# Altium PCB FCB_REV3.PcbDoc (part 2 of 2)
Units mil, origin at the board's own origin, x right, y up, seen from the top; angles counter-clockwise.
Board outline 3750 x 3250 mil, 4 copper layers (Top Layer, Layer 1, Layer 2, Bottom Layer), stack 23.756 mil thick; 113 components, 86 nets, 742 pads, 129 vias.
Unrouted connection lines stored in the file: 77.
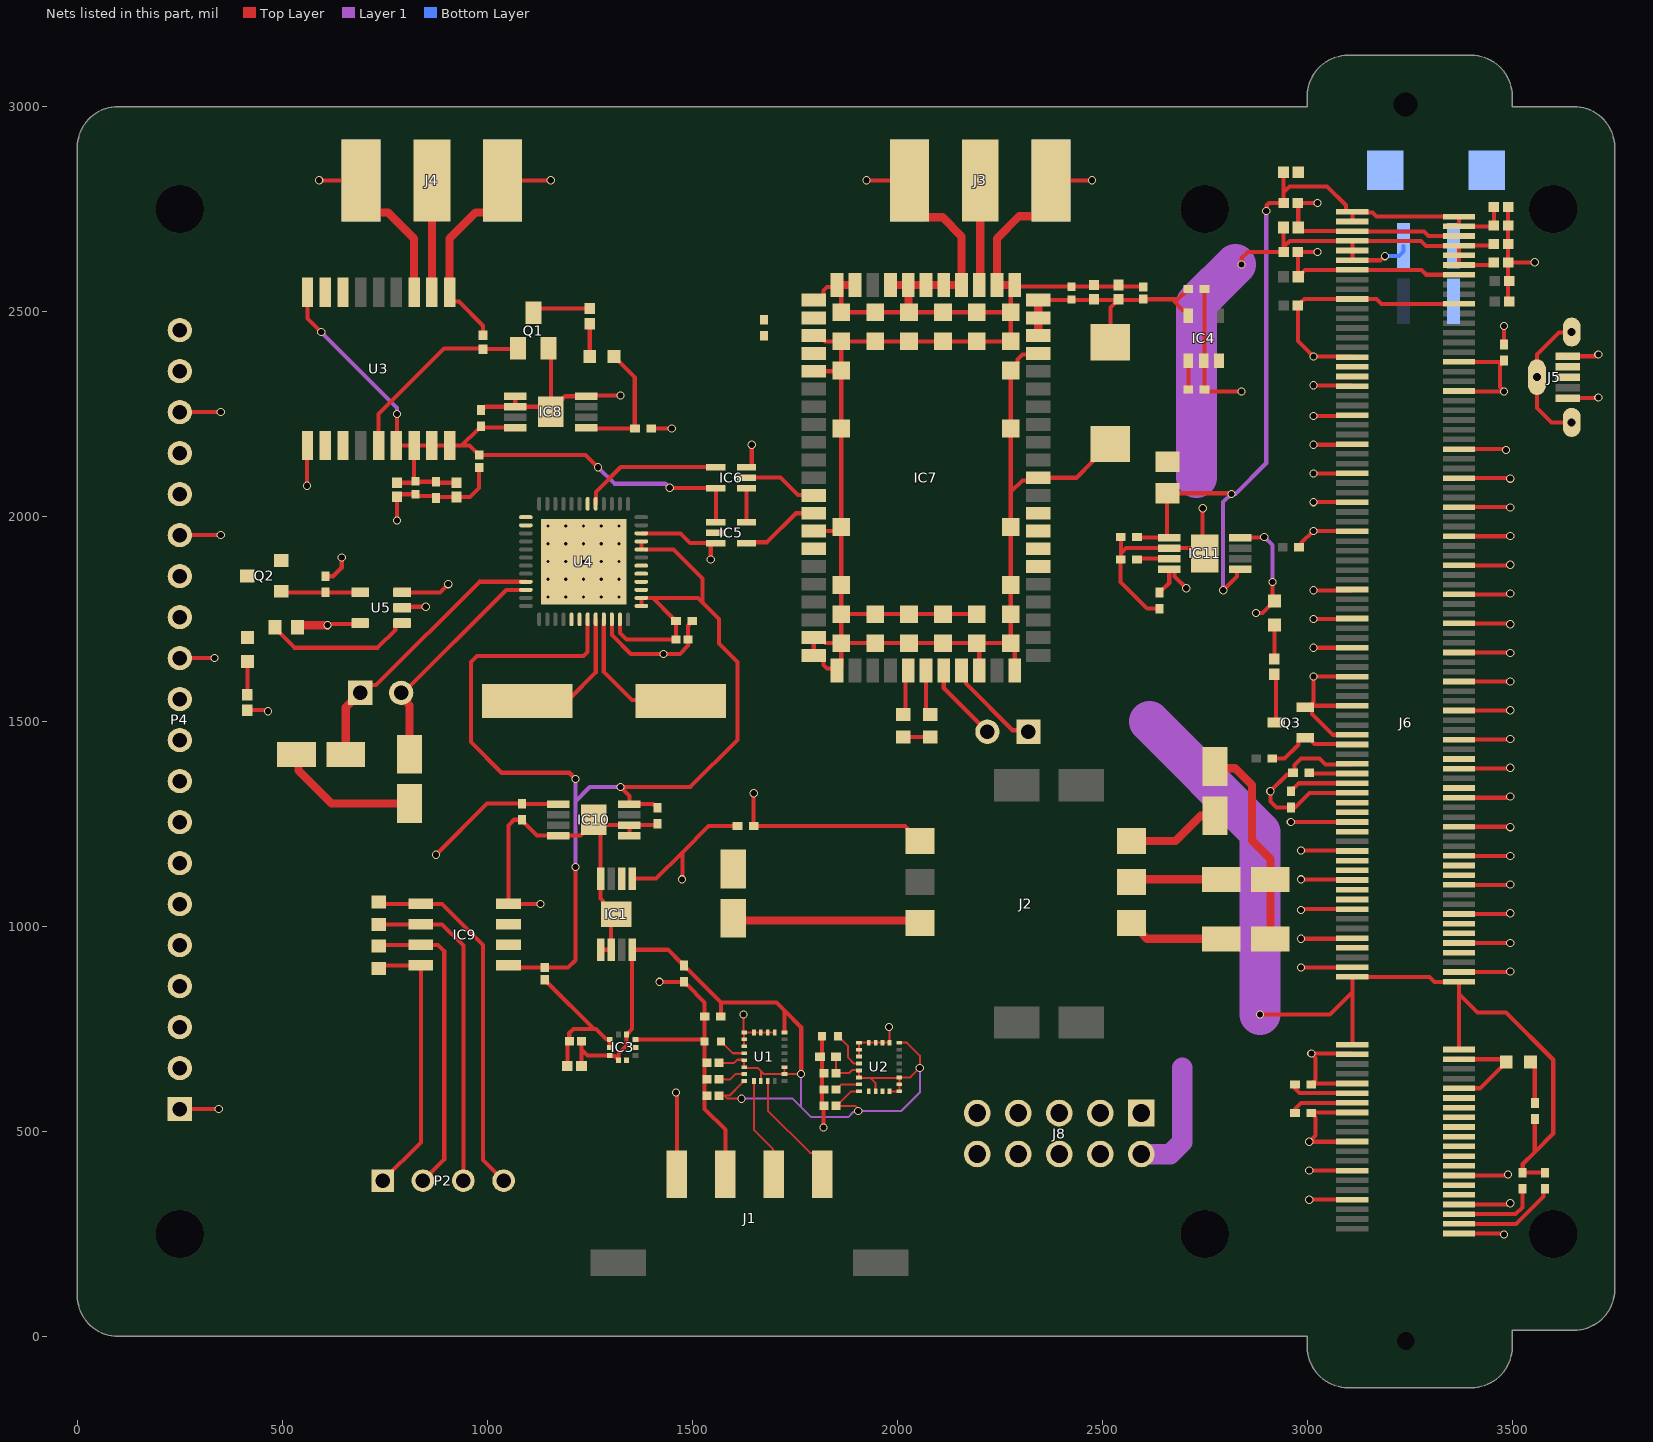
[diagram p4: the nets of this part, all layers, seen from the top]

## Via types
v1: diameter 20, hole 15, Top Layer to Bottom Layer, 104 vias
v2: diameter 19.68, hole 7.87, Top Layer to Bottom Layer, 25 vias

## Nets (pads, with @x,y where several pads share a name; then routed paths per layer and width w, separated by ;. In a path a pad name is that pad's centre, name@x,y a point inside that pad or via, vN(x,y) a via of type N, cw(c..) or ccw(c..) an arc to the next point about the centre after c; other vN are vias at no path point) (continued)
3.3V: C41.2 C50.2 C51.1 C52.1 C53.1 C54.1 DS3.1 IC11.4 IC11.8 J6.39 J6.40 J6.41 J6.42 J6.189 J6.190 J6.191 J6.192 J6.193 J6.194 R25.1 R26.1 R30.1 U5.3 | length 4570.4
  Top Layer w10: U5.3@792.36,1815 885,1815 v1(905,1835) ; C41.2@2640,1814.69 2640,1816.65 2644.84,1821.5 2646.81,1821.5 2663.39,1838.07 IC11.4@2663.39,1871.61 2672.53,1871.61 2676.39,1867.76 2676.39,1853.61 v1(2705,1825) ; IC11.8@2836.61,1948.39 2893.39,1948.39 v1(2895,1950) ; v1(2840,2615) 2840.18,2615.18 2840.18,2630.18 2855,2645 C51.1@2942.68,2645 ; v1(2875,1765) 2890.94,1765 DS3.1@2920,1794.06 2915,1799.06 v1(2915,1840) ; v1(2885,785) 3055,785 3110.08,840.08 ; C50.2@2941.89,2705 2941.89,2650.43 2945,2647.32 2945,2660 2957.32,2672.32 J6.193@3110.08,2672.32 ; J6.40@3110.08,711.69 3110.08,840.08 ; v1(3190,2635) 3189.06,2635 3179.14,2625.08 J6.189@3110.08,2625.08 J6.191@3110.08,2648.7 J6.193@3110.08,2672.32 ; J6.39@3369.92,699.88 3369.92,835 ; C53.1@3455.35,2620 3448.62,2613.27 J6.190@3369.92,2613.27 J6.192@3369.92,2636.89 J6.194@3369.92,2660.51 ; C52.1@3455.35,2665 3450.87,2660.51 J6.194@3369.92,2660.51 ; R30.1@3555,530.32 3555,450 ; R25.1@3580,399.68 R26.1@3525,399.68 3525.64,400.32 3525.64,420.64 3555,450 ; 3110.08,840.08 J6.42@3110.08,877.05 3297.95,877.05 3310,865 3369.69,865 3369.92,864.76 3369.92,835 ; J6.193@3110.08,2672.32 3277.68,2672.32 3290,2660 3369.41,2660 J6.194@3369.92,2660.51 ; 3369.92,835 3414.92,790 3485,790 3600,675 3600,495 3555,450
  Layer 1 w10: v1(2895,1950) 2915,1930 v1(2915,1840)
  Layer 1 w40: 2825,2615 v1(2840,2615)
  Layer 1 w100: 2615,1500 2885,1230 v1(2885,785) ; 2730,2095.57 2730,2520 2735,2525 2825,2615
  Bottom Layer w10: v1(3190,2635) 3223.86,2635 3235,2646.14 C54.1@3235,2660
3.8_SARA_EN: IC4.3 J6.48
5V: C9.2 C11.2 C14.2 C22.2 DS1.1 F1.2 IC1.1 IC4.1 IC8.1 IC10.1 J1.4 J8.2 L3.1 U5.5 | length 1766.7
  Top Layer w10: F1.2@537.56,1730 F1.2@542.56,1735 ; v1(610,1735) 612.6,1737.6 687.4,1737.6 U5.5@690,1740.2 ; v1(875,1175) 999.68,1299.68 C11.2@1085,1299.68 1086.3,1298.39 IC10.1@1173.39,1298.39 ; IC8.1@1241.61,2216.61 1243.23,2215 C22.2@1359.84,2215 ; DS1.1@1309.06,2390 1359.84,2339.21 C22.2@1359.84,2215 ; IC1.1@1353.39,1116.61 1411.61,1116.61 1475.81,1180.81 ; C22.2@1360.31,2215 C22.2@1359.84,2215 ; v1(1460,595) 1460,592.29 1462.56,589.73 J1.4@1462.56,395.75 ; v1(1475,1115) 1475.81,1115.81 1475.81,1180.81 ; C9.2@1608.35,1245 1540,1245 1475.81,1180.81 ; C14.2@2705.16,2305.16 C14.2@2710,2310 IC4.1@2710,2379.76
  Top Layer w20: F1.2@542.56,1735 v1(610,1735)
  Layer 1 w50: J8.2@2595,445 2665.71,445 2695,474.29 2695,655
5V_COMPUTE: C42.2 C45.1 C46.2 C47.1 C48.1 C49.1 IC11.1 IC11.5 J6.197 J6.198 J6.199 J6.200 L3.2 | length 2195.3
  Top Layer w10: C42.2@2584.69,1950 2586.3,1948.39 IC11.1@2663.39,1948.39 ; L3.2@2636.06,2066.37 L3.2@2652.43,2050 ; IC11.1@2657.53,1948.39 2657.53,2041.67 L3.2@2665.85,2050 ; L3.2@2659.14,2056.71 2813.29,2056.71 v1(2815,2055) ; v1(2795,1820) 2828.61,1853.61 2828.61,1867.76 2832.47,1871.61 IC11.5@2836.61,1871.61 ; v1(2900,2745) 2901.21,2746.21 2901.21,2759.14 2907.07,2765 C49.1@2942.68,2765 2941.89,2765.79 2941.89,2790 ; C46.2@2941.89,2840 2941.89,2790 ; J6.197@3110.08,2719.57 J6.199@3110.08,2743.19 ; C47.1@3455.35,2755 C48.1@3455.35,2710 3453.11,2707.76 J6.198@3369.92,2707.76 J6.200@3369.92,2731.38 3168.62,2731.38 3158.7,2741.3 3111.97,2741.3 J6.199@3110.08,2743.19 ; 2941.89,2790 2956.89,2805 3048.27,2805 3094.05,2759.22 3094.05,2745.08 3095.94,2743.19 J6.199@3110.08,2743.19
  Layer 1 w10: v1(2795,1820) 2795,2035 v1(2815,2055) 2825,2055 2900,2130 v1(2900,2745)
5V_PDB: DS2.1 F1.1 P4.13 P4.14 Q2.3 U5.1 | length 363.2
  Top Layer w10: Q2.3@415,1854.58 Q2.3@415,1855 ; F1.1@482.44,1730 493.19,1719.25 493.19,1716.81 530,1680 732.17,1680 775.71,1723.54 775.71,1733.39 782.52,1740.2 U5.1@792.36,1740.2
+1.8_SARA_OUT: IC5.5 IC6.1 IC7.4 R4.2 R5.2 | length 148.8
  Top Layer w10: IC5.5@1632.4,1985.59 IC6.1@1632.4,2069.41 ; R5.2@2015,1462.44 R4.2@2080,1462.44
+3.3_ADC_BARO_ACC: C1.2 C2.2 C5.2 C6.2 C10.2 C12.2 C13.2 C31.2 C33.2 IC1.8 IC3.1 IC3.6 IC3.10 U1.1 U1.3 U1.7 U1.8 U1.13 U1.22 U1.23 U2.1 U2.3 U2.5 U2.6 U2.7 U2.8 U2.13 U2.22 U2.23 | length 2733.6
  Top Layer w5: C2.2@1565.71,667.32 1602.32,667.32 1610,675 1625.43,675 U1.22@1626.57,673.86 U1.23@1626.57,656.93 1628.48,655.03 1634.2,655.03 ; v1(1620,580) 1585.61,580 1578.29,587.32 1590.83,587.32 1622.18,618.68 1622.18,621.04 1624.21,623.07 U1.1@1626.57,623.07 ; 1634.22,655 1660,655 1667.32,647.68 ; U1.3@1667.32,623.07 1667.32,647.68 ; U1.8@1725,656.93 U1.7@1725,640 ; v1(1765,640) U1.7@1725,640 ; C33.2@1850.79,562.32 1897.68,562.32 1905,555 v1(1905,550) ; C5.2@1850.83,682.32 C6.2@1850.83,642.32 1882.32,642.32 1890,650 1905.43,650 U2.22@1906.57,648.86 U2.23@1906.57,631.93 1908.5,630 1935,630 ; C33.2@1851.56,561.56 1851.56,562.3 1859.31,570.06 1860.06,570.06 1888.07,598.07 U2.1@1906.57,598.07 ; U2.3@1947.32,598.07 1947.32,617.68 1935,630 ; U2.5@1981.18,598.07 U2.6@2005,598.07 U2.7@2005,615 U2.8@2005,631.93 ; U2.13@2005,716.57 2023.43,716.57 2055,685 v1(2055,655) 2031.93,631.93 U2.8@2005,631.93 ; 1667.32,647.68 1675,640 U1.7@1725,640 ; 1935,630 2003.07,630 U2.8@2005,631.93
  Top Layer w10: C13.2@1229.96,720 C13.2@1229.96,720 1230,700 ; C12.2@1230,660 1230,700 ; IC3.1@1320,674.65 1320,690 1339.84,709.84 IC3.6@1339.84,736.5 1339.84,737.48 1340.75,738.39 1341.73,738.39 1353.39,750.04 IC1.8@1353.39,943.39 1441.3,943.39 1473.19,911.5 1475.16,911.5 1480,906.65 C10.2@1480,904.69 1480,902.72 1484.84,897.87 1486.81,897.87 1569.69,815 ; IC3.1@1320.16,673.5 1320.16,674.49 1319.25,675.39 1310.24,684.41 1299.41,684.41 IC3.10@1298.5,685.32 1244.68,685.32 1230,700 ; C1.2@1569.69,780 1569.69,815 ; U1.13@1725,741.57 1725,795 ; v1(1765,640) 1765.86,640.86 1765.86,754.14 1725,795 ; 1569.69,815 1705,815 1725,795
  Layer 1 w5: v1(1620,580) 1745,580 1765,560 ; v1(1765,640) 1765,560 ; v1(2055,655) 2055,595 2010,550 v1(1905,550) 1902.63,547.63 1892.63,547.63 1880,535 1790,535 1765,560
+3.3_GPS: C21.2 C23.1 C24.1 C25.2 C26.2 C27.2 IC5.1 IC6.5 IC8.8 U3.6 U3.7 U3.8 U3.9 U3.18 | length 1761.1
  Top Layer w10: U3.18@561.77,2547.01 561.77,2483.23 v1(595,2450) ; C23.1@780,2082.32 821.57,2082.32 C24.1@825,2085.75 ; v1(780,2250) 780,2174.68 U3.6@778.31,2172.99 U3.7@821.61,2172.99 ; C26.2@925,2082.32 877.36,2082.32 C25.2@875,2084.69 826.06,2084.69 C24.1@825,2085.75 ; IC8.8@1068.39,2216.61 988.7,2216.61 C21.2@985,2220.31 985,2218.35 980.16,2213.5 978.19,2213.5 937.68,2172.99 ; v1(1270,2120) 1240,2150 C27.2@980,2149.96 C27.2@980,2149.96 980,2150.75 974.76,2155.98 973.98,2155.98 956.97,2172.99 937.68,2172.99 ; v1(1445,2070) 1445.59,2069.41 IC6.5@1557.6,2069.41 IC5.1@1557.6,1985.59 ; U3.7@821.61,2172.99 U3.8@864.92,2172.99 U3.9@908.23,2172.99 937.68,2172.99 ; U3.7@821.61,2172.99 821.61,2089.13 C24.1@825,2085.75
  Layer 1 w10: v1(595,2450) 779.82,2265.18 779.82,2250.18 v1(780,2250) ; v1(1270,2120) 1310,2080 1434.14,2080 1444.14,2070 v1(1445,2070)
+3.3_MAX3488_MAX14830: C28.2 C29.2 C30.2 C32.2 IC9.1 IC10.8 U4.1 U4.2 U4.8 U4.9 U4.43 U4.47 | length 3148.5
  Top Layer w10: IC9.1@1051.77,905 1056.77,900 C28.2@1140,900 1197.29,900 1215,917.71 v1(1215,1145) ; v1(1215,1360) 1200,1375 1035,1375 960,1450 960,1645 975.03,1660.03 1235.03,1660.03 1244.84,1669.84 U4.43@1244.84,1749.25 ; U4.47@1323.58,1749.25 1323.58,1715.86 1339.44,1700 C32.2@1460.04,1700 1460.04,1744.72 C30.2@1460.31,1745 C30.2@1455,1750.31 ; U4.1@1375.75,1781.73 U4.2@1375.75,1801.42 1403.9,1801.42 ; U4.8@1375.75,1919.53 U4.9@1375.75,1939.21 ; U4.8@1387.48,1919.61 1387.87,1920 1454.14,1920 1525,1849.14 1525,1790 ; C29.2@1415,1289.69 1415,1291.65 1410.16,1296.5 1406.19,1296.5 1404.3,1298.39 IC10.8@1346.61,1298.39 1346.61,1318.39 v1(1325,1340) 1495,1340 1610,1455 1610,1645 1565,1690 1565,1750 1525,1790 ; C30.2@1453.5,1749.84 1453.5,1751.81 1403.9,1801.42 ; 1403.9,1801.42 1513.58,1801.42 1525,1790
  Layer 1 w10: v1(1215,1145) 1215,1305 ; v1(1215,1360) 1215,1305 ; v1(1325,1340) 1250,1340 1215,1305
+3.8_SARA: C15.2 C16.1 C17.2 C18.2 C19.2 C20.2 IC4.5 IC7.51 IC7.52 IC7.53 | length 639.2
  Top Layer w10: IC7.53@2343.7,2527.6 C18.2@2538.39,2527.6 ; C16.1@2520,2425 2520,2510 2532.01,2522.01 2532.8,2522.01 C18.2@2538.39,2527.6 ; C18.2@2540,2530 2540,2529.21 C18.2@2538.39,2527.6 ; IC4.5@2710,2490 2710,2495.91 2703.19,2502.72 2697.28,2502.72 2670,2530 ; C15.2@2710,2555 2708.03,2555 2703.19,2550.16 2703.19,2548.19 2685,2530 2670,2530 ; C18.2@2538.39,2527.6 2597.6,2527.6 C19.2@2600,2530 2670,2530
  Top Layer w20: IC7.51@2343.7,2440.98 IC7.52@2343.7,2484.29 IC7.53@2343.7,2527.6
A1: IC9.8 P2.1 R9.1 | length 670.1
  Top Layer w10: R9.1@735,897.44 742.56,905 IC9.8@838.23,905 838.23,473.5 P2.1@744.72,380
B1: IC9.7 P2.2 R9.2 | length 748.7
  Top Layer w10: R9.2@735,952.56 737.44,955 IC9.7@838.23,955 880,955 895,940 895,431.85 P2.2@843.15,380
C1: C3.2 C7.2 U1.24 U2.24 | length 127.5
  Top Layer w5: C3.2@1565.79,627.32 1592.32,627.32 1605,640 U1.24@1626.57,640 ; C7.2@1850.79,602.32 1851.57,602.32 1859.31,610.06 1859.31,610.85 1863.46,615 U2.24@1906.57,615
CAP1: C4.1 C8.1 U1.21 U2.21 | length 163.8
  Top Layer w5: C4.1@1569.68,720 1598.9,690.79 U1.21@1626.57,690.79 ; C8.1@1855.83,732.32 1863.17,724.98 1880,708.15 1880,680 1894.21,665.79 U2.21@1906.57,665.79
CGND: D1.2 D2.2 D3.2 D4.2 D7.2 D8.2 J5.6 J5.7 J5.8 | length 1185.1
  Top Layer w10: D7.2@534.92,1420 D7.2@539.65,1415.27 ; J5.7@3645,2229.53 3595.47,2229.53 3560,2265 3560,2339.41 J5.8@3560.35,2339.76 3560.35,2395.35 3614.2,2449.2 3644.2,2449.2 J5.6@3645,2450
  Top Layer w20: D7.2@539.65,1415.27 539.65,1380.35 620.08,1299.92 D8.2@810,1299.92 ; D1.2@2775,1390.08 2778.87,1386.2 2823.8,1386.2 2865,1345 2865,1210 2910.04,1164.96 D2.2@2910.04,970
CHIP_SELECT: J6.58 U4.5
GMS_ANT: IC7.56 J3.1 | length 256
  Top Layer w20: IC7.56@2200,2565 2202.5,2567.5 J3.1@2202.5,2820
GND: C1.1 C2.1 C3.1 C4.2 C5.1 C6.1 C7.1 C8.2 C9.1 C10.1 C11.1 C12.1 C13.1 C14.1 C15.1 C16.2 C17.1 C18.1 C19.1 C20.1 C21.1 C22.1 C23.2 C24.2 C25.1 C26.1 C27.1 C28.1 C29.1 C30.1 C31.1 C32.1 C33.1 C40.1 C41.1 C42.1 C43.1 C44.1 C45.2 C46.1 C47.2 C48.2 C49.2 C50.1 C51.2 C52.2 C53.2 C54.2 C55.1 C56.2 C57.2 C58.2 C59.2 DS4.2 IC1.4 IC1.5 IC1.6 IC1.9 IC3.5 IC3.8 IC3.9 IC4.2 IC5.3 IC6.3 IC7.1 IC7.3 IC7.5 IC7.14 IC7.20 IC7.21 IC7.22 IC7.30 IC7.32 IC7.43 IC7.50 IC7.54 IC7.55 IC7.57 IC7.58 IC7.59 IC7.60 IC7.61 IC7.63 IC7.64 IC7.65 IC7.66 IC7.67 IC7.68 IC7.69 IC7.70 IC7.71 IC7.72 IC7.73 IC7.74 IC7.75 IC7.76 IC7.77 IC7.78 IC7.79 IC7.80 IC7.81 IC7.82 IC7.83 IC7.84 IC7.85 IC7.86 IC7.87 IC7.88 IC7.89 IC7.90 IC7.91 IC7.92 IC7.93 IC7.94 IC7.95 IC7.96 IC8.4 IC8.5 IC8.6 IC8.9 IC9.4 IC10.4 IC10.5 IC10.6 IC10.9 IC11.2 IC11.9 J1.3 J2.4 J3.2 J3.3 J3.4 J3.5 J4.2 J4.3 J4.4 J4.5 J5.5 J6.1 J6.7 J6.8 J6.13 J6.14 J6.19 J6.20 J6.25 J6.26 J6.31 J6.32 J6.37 J6.38 J6.43 J6.44 J6.49 J6.50 J6.55 J6.56 J6.61 J6.62 J6.67 J6.68 J6.73 J6.74 J6.79 J6.80 J6.85 J6.86 J6.91 J6.92 J6.97 J6.98 J6.103 J6.104 J6.109 J6.110 J6.115 J6.116 J6.121 J6.122 J6.127 J6.133 J6.134 J6.139 J6.140 J6.145 J6.146 J6.151 J6.152 J6.157 J6.163 J6.164 J6.169 J6.170 J6.181 J6.182 J6.187 J6.188 J6.195 J6.196 J8.4 P4.1 P4.12 P4.15 P4.18 Q1.2 Q3.2 R2.2 R8.2 R22.1 R23.2 R24.2 R28.2 R29.2 U1.14 U1.15 U1.16 U1.17 U1.18 U1.19 U1.20 U2.14 U2.15 U2.16 U2.17 U2.18 U2.19 U2.20 U3.1 U3.10 U3.12 U4.10 U4.46 U4.49 U5.2 | length 21901.3
  Top Layer w5: v1(1625,785) 1625,743.15 U1.18@1626.57,741.57 ; U1.20@1626.57,707.72 U1.19@1626.57,724.65 U1.18@1626.57,741.57 ; U1.14@1700,742.76 U1.14@1701.18,741.57 U1.17@1650.39,741.57 U1.18@1626.57,741.57 ; U2.20@1906.57,682.72 U2.19@1906.57,699.65 U2.18@1906.57,716.57 U2.16@1947.32,716.57 U2.15@1964.25,716.57 U2.14@1981.18,716.57 1981.18,753.82 v1(1980,755)
  Top Layer w10: P4.1@250,554.58 344.58,554.58 v1(345,555) ; P4.12@250,1654.58 334.58,1654.58 v1(335,1655) ; P4.15@250,1954.58 349.58,1954.58 v1(350,1955) ; P4.18@250,2254.58 349.58,2254.58 v1(350,2255) ; R22.1@415,1527.6 459.7,1527.6 462.29,1525 v1(465,1525) ; v1(560,2075) 560,2171.22 U3.1@561.77,2172.99 ; v1(590,2820) J4.2@692.5,2820 ; R2.2@605,1854.37 624.37,1854.37 645,1875 v1(645,1900) ; J4.2@687.5,2810 J4.2@692.5,2805 ; v1(780,1990) C23.2@780,2047.68 786.57,2054.25 C24.2@825,2054.25 829.25,2050 870.31,2050 C25.1@875,2045.32 877.36,2047.68 C26.1@925,2047.68 957.68,2047.68 980,2070 C27.1@980,2120.04 ; U5.2@792.36,1777.6 794.76,1780 v1(850,1780) ; U3.10@908.23,2547.01 908.23,2532.87 917.01,2524.09 931.15,2524.09 990,2465.24 R8.2@990,2441.73 ; C21.1@985,2259.68 985,2261.65 989.84,2266.5 994.4,2266.5 995.7,2267.8 IC8.6@1068.39,2267.8 ; J4.3@1037.5,2779.22 J4.3@1037.5,2807.5 ; J4.3@1037.5,2820 v1(1155,2820) ; IC8.5@1068.39,2293.39 IC8.6@1068.39,2267.8 ; v1(1130,1055) IC9.4@1051.77,1055 1051.77,1246.77 1065.32,1260.32 C11.1@1085,1260.32 1085,1258.35 1089.84,1253.5 1121.73,1221.61 IC10.4@1173.39,1221.61 1227.91,1221.61 1260,1253.7 IC10.9@1260,1260 IC10.9@1272.8,1247.2 ; C28.1@1140,870.08 1140,869.29 1145.24,864.06 1146.02,864.06 1260.08,750 ; Q1.2@1149.8,2410 1155,2404.8 IC8.9@1155,2261.3 ; C12.1@1195.35,660 1195.35,715.32 C13.1@1200.04,720 1200.04,740.04 1210,750 1260.08,750 ; IC1.5@1276.61,943.39 IC1.6@1302.2,943.39 ; IC3.9@1298.5,705 IC3.8@1298.5,724.68 1297.6,725.59 1289.41,725.59 1265,750 1260.08,750 ; U4.46@1303.9,1749.25 1303.9,1711.1 1350,1665 v1(1430,1665) 1470,1665 1489.96,1684.96 C32.1@1489.96,1700 1489.96,1734.3 1492.87,1737.21 1492.87,1740.16 1497.72,1745 C30.1@1499.68,1745 ; IC1.6@1305,940.59 IC1.6@1302.2,943.39 ; v1(1325,2295) 1243.23,2295 IC8.4@1241.61,2293.39 1190.24,2293.39 1184.06,2287.2 1180.91,2287.2 IC8.9@1155,2261.3 ; IC10.5@1346.61,1221.61 IC10.6@1346.61,1247.2 ; IC3.5@1361.5,724.68 1525.63,724.68 C4.2@1530.32,720 ; U4.10@1375.75,1958.9 1471.1,1958.9 1495,1935 1557.01,1935 IC5.3@1557.6,1934.41 1547.87,1934.41 1545,1931.54 v1(1545,1895) ; C22.1@1399.68,2215 v1(1450,2215) ; C29.1@1415,1250.32 1411.89,1247.2 IC10.6@1346.61,1247.2 ; v1(1420,865) 1479.68,865 C10.1@1480,865.32 1480,863.35 1484.84,858.5 1486.81,858.5 1530.32,815 C1.1@1530.32,780 C4.2@1530.32,720 ; C31.1@1535.83,587.32 C31.1@1535.55,587.32 ; J1.3@1580.67,395.75 1580.67,504.33 1530,555 1530,582.09 1535.24,587.32 C31.1@1535.55,587.32 ; IC6.3@1632.4,2120.59 1642.13,2120.59 1645,2123.46 v1(1645,2175) ; v1(1650,1325) 1649.68,1324.68 C9.1@1649.68,1245 2018.74,1245 2024.76,1238.98 2024.76,1235.04 2051.26,1208.54 J2.4@2055.19,1208.54 ; IC7.14@1796.46,1964.61 1853.54,1964.61 IC7.81@1863.39,1974.45 ; IC7.5@1796.46,2354.37 IC7.77@1861.42,2354.37 ; IC7.3@1796.46,2440.98 1810.24,2440.98 1824.02,2427.2 IC7.71@1863.39,2427.2 ; IC7.1@1796.46,2527.6 1808.95,2527.6 1819.7,2538.35 1819.7,2550.84 1828.65,2559.79 1848.34,2559.79 IC7.64@1853.54,2565 1863.39,2555.16 IC7.65@1863.39,2498.07 IC7.66@1946.06,2498.07 IC7.67@2028.74,2498.07 IC7.68@2111.42,2498.07 IC7.69@2194.09,2498.07 IC7.70@2276.77,2498.07 ; C8.2@1816.46,732.32 1816.46,566.73 C33.1@1820.87,562.32 1820,561.46 v1(1820,510) ; v1(1925,2820) J3.2@2030,2820 ; IC7.89@2194.09,1761.85 IC7.88@2111.42,1761.85 IC7.87@2028.74,1761.85 IC7.86@1946.06,1761.85 IC7.85@1863.39,1761.85 ; IC7.30@2200,1624.06 2200,1685.08 IC7.95@2194.09,1690.98 ; IC7.32@2286.61,1624.06 2286.61,1681.14 IC7.96@2276.77,1690.98 ; IC7.50@2343.7,2397.68 2341.05,2395.03 2305.03,2395.03 2293.43,2383.43 2293.43,2372.99 IC7.78@2276.77,2356.34 IC7.80@2276.77,2214.61 2276.77,2060 ; J3.3@2375,2820 v1(2475,2820) ; C16.2@2516.46,2177.37 2476.77,2137.68 2476.77,2133.74 2437.56,2094.53 IC7.43@2343.7,2094.53 2337.43,2088.26 2305.03,2088.26 2276.77,2060 ; C42.1@2545.32,1950 2545.32,1910 ; C19.1@2600,2559.92 2599.17,2560.75 C17.1@2425,2560.75 2290.87,2560.75 IC7.54@2286.61,2565 2276.77,2555.16 IC7.70@2276.77,2498.07 ; C41.1@2640,1775.32 2609.68,1775.32 2545,1840 2545,1894.69 C43.1@2545.32,1895 2545.32,1910 ; v1(2745,2020) 2745,1895 2760,1880 2770,1890 IC11.9@2750,1910 2737.2,1922.8 IC11.2@2663.39,1922.8 2558.11,1922.8 2545.32,1910 ; C15.1@2749.37,2555 2749.37,2381.73 IC4.2@2747.4,2379.76 2749.37,2377.8 C14.1@2749.37,2310 2754.21,2305.16 2761.88,2305.16 2762.04,2305 v1(2840,2305) ; v1(2960,1255) J6.74@3110.08,1255 ; C40.1@2979.68,1925 2981.65,1925 2986.5,1929.84 2986.5,1936.5 v1(3015,1965) 3108.74,1965 J6.134@3110.08,1963.66 ; v1(2985,900) 3109.41,900 J6.44@3110.08,900.67 ; v1(2985,970) 3108.54,970 J6.50@3110.08,971.54 ; v1(2985,1040) 2987.71,1040 2990.11,1042.4 J6.56@3110.08,1042.4 ; v1(2985,1115) 3108.35,1115 J6.62@3110.08,1113.27 ; v1(2985,1185) 3109.21,1185 J6.68@3110.08,1184.13 ; Q3.2@2995,1534.8 Q3.2@3002.93,1534.8 ; v1(3005,333.62) 3005,332.71 3007.71,330 3011.45,333.74 J6.8@3110.08,333.74 ; v1(3005,405) 3109.68,405 J6.14@3110.08,404.61 ; R24.2@3009.68,615 3011.65,615 R24.2@3013.86,617.2 ; v1(3015,1680) 3109.88,1680 J6.110@3110.08,1680.2 ; v1(3015,1750) 3109.02,1750 J6.116@3110.08,1751.06 ; v1(3015,1820) 3069.85,1820 3069.89,1820.04 3108.19,1820.04 J6.122@3110.08,1821.93 ; v1(3015,2035) 3109.61,2035 J6.140@3110.08,2034.53 ; v1(3015,2105) 3109.68,2105 J6.145@3110.08,2105.39 ; v1(3015,2175) 3108.82,2175 J6.151@3110.08,2176.26 ; v1(3015,2245) 3069.85,2245 3070.09,2245.24 3108.19,2245.24 J6.157@3110.08,2247.13 ; v1(3015,2320) 3069.85,2320 3069.97,2319.88 3108.19,2319.88 J6.163@3110.08,2317.99 ; v1(3025,2645) C51.2@2977.32,2645 2977.32,2585.79 C55.1@2978.11,2585 2978.11,2585.59 2986.69,2594.17 2987.28,2594.17 2994.57,2601.46 J6.187@3110.08,2601.46 3278.54,2601.46 3290.35,2589.65 J6.188@3369.92,2589.65 ; v1(3025,2765) C49.2@2977.32,2765 2978.11,2764.21 C50.1@2978.11,2705 2978.11,2704.53 2986.69,2695.94 J6.195@3110.08,2695.94 3111.02,2695 3285,2695 3295.87,2684.13 J6.196@3369.92,2684.13 ; J6.181@3085.08,2530.59 2992.91,2530.59 2985.12,2522.8 2985.12,2522.2 2977.91,2515 C56.2@2977.32,2515 2977.32,2427.68 v1(3015,2390) 3108.94,2390 J6.169@3110.08,2388.86 ; J6.20@3110.08,475.47 3109.61,475 v1(3005,475) 3020,490 3020,534.69 3016.5,538.19 3016.5,540.16 3011.65,545 R28.2@3009.69,545 3011.02,546.34 J6.26@3110.08,546.34 ; J6.32@3110.08,617.2 R24.2@3013.86,617.2 ; J6.38@3110.08,688.07 3108.19,689.96 3069.89,689.96 3069.85,690 v1(3010,690) 3010,689.14 3020,679.14 3020,625.32 3016.5,621.81 3016.5,619.84 R24.2@3013.86,617.2 ; J6.80@3110.08,1325.87 3005.87,1325.87 2970,1290 2960.32,1290 R29.2@2960,1290.31 2924.69,1290.31 2910,1305 v1(2910,1330) 2950.16,1370.16 2960.47,1370.16 R23.2@2965.31,1375 2968.98,1378.67 2968.98,1393.98 2985,1410 3030,1410 3045,1395 3108.35,1395 J6.86@3110.08,1396.73 ; J6.92@3110.08,1467.6 3062.4,1467.6 3011.65,1518.35 3011.65,1527.99 3004.84,1534.8 Q3.2@3002.93,1534.8 ; J6.98@3110.08,1538.46 Q3.2@3008.5,1538.46 ; J6.104@3110.08,1609.33 3109.41,1610 v1(3015,1610) 3015,1547.47 3011.65,1544.13 3011.65,1541.61 Q3.2@3008.5,1538.46 ; J6.181@3110.08,2530.59 3169.41,2530.59 3181.22,2518.78 J6.182@3369.92,2518.78 ; J6.1@3369.92,251.06 3474.85,251.06 3477.29,248.62 v1(3480,248.62) ; J6.7@3369.92,321.93 3489.22,321.93 3492.29,325 v1(3495,325) ; J6.13@3369.92,392.8 3485.09,392.8 3487.29,395 v1(3490,395) ; J6.31@3369.92,605.39 3420.87,605.39 DS4.2@3485.47,670 3479.21,676.26 J6.37@3369.92,676.26 J6.37@3371.81,678.15 ; J6.43@3369.92,888.86 3493.86,888.86 v1(3495,890) ; J6.49@3369.92,959.72 3370.2,960 v1(3495,960) ; J6.55@3369.92,1030.59 3487.88,1030.59 3492.29,1035 v1(3495,1032.29) ; J6.61@3369.92,1101.46 3494.16,1101.46 v1(3495,1102.29) ; J6.67@3369.92,1172.32 v1(3495,1172.29) ; J6.73@3369.92,1243.19 3494.11,1243.19 v1(3495,1242.29) ; J6.79@3369.92,1314.06 3489.06,1314.06 3492.29,1317.29 v1(3495,1317.29) ; J6.85@3369.92,1384.92 3489.92,1384.92 3492.29,1387.29 v1(3495,1387.29) ; J6.91@3369.92,1455.79 3493.49,1455.79 v1(3495,1457.29) ; J6.97@3369.92,1526.65 3494.36,1526.65 v1(3495,1527.29) ; J6.103@3369.92,1597.52 3494.77,1597.52 v1(3495,1597.29) ; J6.109@3369.92,1668.39 3493.91,1668.39 v1(3495,1667.29) ; J6.115@3369.92,1739.25 3490.34,1739.25 3492.29,1737.29 v1(3495,1737.29) ; J6.121@3369.92,1810.12 3490.12,1810.12 3492.29,1812.29 v1(3495,1812.29) ; J6.127@3369.92,1880.98 3493.69,1880.98 v1(3495,1882.29) ; J6.133@3369.92,1951.85 3494.56,1951.85 v1(3495,1952.29) ; J6.139@3369.92,2022.72 3494.58,2022.72 v1(3495,2022.29) ; J6.146@3369.92,2093.58 3493.71,2093.58 v1(3495,2092.29) ; J6.152@3369.92,2164.45 3480.14,2164.45 3482.29,2162.29 v1(3485,2162.29) ; J6.164@3369.92,2306.18 3371.1,2305 v1(3480,2305) 3480,2305.86 3470,2315.86 3470,2368.35 3480,2378.35 C44.1@3480,2380.32 3476.73,2377.05 J6.170@3369.92,2377.05 ; C47.2@3490,2755 C48.2@3490,2710 C52.2@3490,2665 C53.2@3490,2620 ; C57.2@3492.32,2525 3490,2527.32 C53.2@3490,2620 ; v1(3555,2620) C53.2@3490,2620 ; J5.5@3635.16,2288.58 3708.58,2288.58 v1(3710,2290) ; IC8.6@1068.39,2267.8 1142.2,2267.8 IC8.9@1155,2255 IC8.9@1155,2261.3 ; IC10.9@1272.8,1247.2 1276.61,1243.39 IC1.4@1276.61,1116.61 1276.61,1068.39 1282.8,1062.2 1282.8,1055.91 1308.7,1030 IC1.9@1315,1030 1302.2,1017.2 IC1.6@1302.2,943.39 ; IC10.9@1272.8,1247.2 IC10.6@1346.61,1247.2 ; C4.2@1530.32,720 1530.32,592.56 C31.1@1535.55,587.32 ; IC7.77@1861.42,2354.37 1863.39,2352.4 IC7.79@1863.39,2214.61 IC7.81@1863.39,1974.45 ; IC7.77@1861.42,2354.37 IC7.77@1863.39,2356.34 IC7.71@1863.39,2427.2 ; IC7.91@1863.39,1690.98 1824.02,1690.98 1810.24,1704.76 IC7.20@1796.46,1704.76 IC7.21@1796.46,1661.46 1808.95,1661.46 1819.7,1650.71 1819.7,1638.21 1828.65,1629.26 1848.34,1629.26 IC7.22@1853.54,1624.06 1863.39,1633.9 IC7.91@1863.39,1690.98 ; IC7.91@1863.39,1690.98 IC7.92@1946.06,1690.98 IC7.93@2028.74,1690.98 IC7.94@2111.42,1690.98 IC7.95@2194.09,1690.98 ; IC7.91@1863.39,1690.98 IC7.85@1863.39,1761.85 ; IC7.85@1863.39,1761.85 IC7.83@1863.39,1832.72 IC7.81@1863.39,1974.45 ; IC7.71@1863.39,2427.2 IC7.72@1946.06,2427.2 IC7.73@2028.74,2427.2 IC7.74@2111.42,2427.2 IC7.75@2194.09,2427.2 IC7.76@2276.77,2427.2 IC7.70@2276.77,2498.07 ; IC7.95@2194.09,1690.98 IC7.96@2276.77,1690.98 ; IC7.96@2276.77,1690.98 IC7.90@2276.77,1761.85 IC7.84@2276.77,1832.72 IC7.82@2276.77,1974.45 2276.77,2060 ; Q3.2@3002.93,1534.8 3006.59,1538.46 Q3.2@3008.5,1538.46
  Top Layer w20: J4.2@692.5,2805 692.5,2779.22 730,2741.72 758.28,2741.72 821.61,2678.39 U3.12@821.61,2547.01 ; U3.10@908.23,2547.01 908.23,2678.23 971.72,2741.72 1000,2741.72 J4.3@1037.5,2779.22 ; J4.3@1037.5,2807.5 J4.3@1037.5,2820 ; IC7.64@1853.54,2565 IC7.63@1896.85,2565 ; IC7.61@1983.46,2565 IC7.60@2026.77,2565 ; J3.2@2026.77,2770.77 2067.5,2730.04 2109.96,2730.04 2156.69,2683.31 IC7.57@2156.69,2565 IC7.58@2113.39,2565 IC7.59@2070.08,2565 IC7.60@2026.77,2565 ; IC7.67@2028.74,2498.07 2027.76,2499.06 2027.76,2564.02 IC7.60@2026.77,2565 ; IC7.54@2286.61,2565 IC7.55@2243.31,2565 2243.31,2678.31 2297.54,2732.54 2337.5,2732.54 2375,2770.04 J3.3@2375,2820
  other v2: 1148.39,1803.39 1191.69,1803.39 1235,1803.39 1278.31,1803.39 1321.61,1803.39 1148.39,1846.69 1191.69,1846.69 1235,1846.69 1278.31,1846.69 1321.61,1846.69 1148.39,1890 1191.69,1890 1235,1890 1278.31,1890 1321.61,1890 1148.39,1933.31 1191.69,1933.31 1235,1933.31 1278.31,1933.31 1321.61,1933.31 1148.39,1976.61 1191.69,1976.61 1235,1976.61 1278.31,1976.61 1321.61,1976.61
GPIO13: IC1.2 J6.47
GPS_ANT: J4.1 U3.11 | length 273
  Top Layer w10: J4.1@864.92,2819.92 J4.1@865,2820
  Top Layer w20: U3.11@864.92,2547.01 J4.1@864.92,2819.92
GPS_RX_3.3: J6.53 P4.16
GPS_SCL: IC7.27 R4.1 U3.17 | length 110.6
  Top Layer w10: IC7.27@2070.08,1624.06 2070.08,1527.48 R4.1@2080,1517.56
GPS_SDA: IC7.26 R5.1 U3.16 | length 109.3
  Top Layer w10: R5.1@2020,1517.56 2020,1617.28 IC7.26@2026.77,1624.06
GPS_TX_3.3: J6.51 P4.17
MISO: J6.60 J8.6 U4.3
MOSI: J6.64 J8.8 U4.6
NetC43_2: C43.2 IC11.3 | length 79.6
  Top Layer w10: C43.2@2584.69,1895 2586.89,1897.2 IC11.3@2663.39,1897.2
NetC44_2: C44.2 J5.1 Q2.2 | length 141.4
  Top Layer w10: C44.2@3480,2419.69 v1(3480,2465) ; J5.1@3617.16,2394.8 3621.02,2390.94 J5.1@3635.16,2390.94 3703.24,2390.94 3707.29,2395 v1(3710,2395)
NetDS1_2: DS1.2 R7.2 | length 80
  Top Layer w10: DS1.2@1250,2390 R7.2@1250,2470
NetDS2_2: DS2.2 R22.2 | length 80.9
  Top Layer w10: R22.2@415,1565 DS2.2@415,1645.94
NetDS3_2: DS3.2 R27.2 | length 82.6
  Top Layer w10: R27.2@2920,1652.4 DS3.2@2920,1735
NetDS4_1: DS4.1 R30.2 | length 104.7
  Top Layer w10: DS4.1@3544.52,670 3555,659.52 R30.2@3555,569.69
NetJ6_28: J6.28 R28.1 | length 156.1
  Top Layer w10: R28.1@2970.32,545 2970.32,555.32 2984.96,569.96 J6.28@3110.08,569.96
NetJ6_30: J6.30 R24.1 | length 154.7
  Top Layer w10: R24.1@2970.32,615 2970.32,604.68 2981.42,593.58 J6.30@3110.08,593.58
NetJ6_82: J6.82 R29.1 | length 159.4
  Top Layer w10: R29.1@2960,1329.68 2960,1331.65 2964.84,1336.5 2966.81,1336.5 2979.8,1349.49 J6.82@3110.08,1349.49
NetJ6_84: J6.84 R23.1 | length 105.4
  Top Layer w10: R23.1@3004.68,1373.11 J6.84@3110.08,1373.11
NetQ1_3: Q1.3 R7.1 | length 142.1
  Top Layer w10: Q1.3@1112.4,2496.61 1123.19,2507.4 R7.1@1250,2507.4
NetQ3_3: Q3.3 R27.1 | length 119.3
  Top Layer w10: R27.1@2920,1615 2924.13,1610.87 Q3.3@2924.13,1497.4
PWR_ON: IC7.15 R3.2
Q3_GATE: J6.90 Q3.1 R31.1 | length 229.9
  Top Layer w10: R31.1@2914.68,1410 2945,1410 2978.35,1443.35 2978.35,1453.19 2985.16,1460 3004.84,1460 3011.65,1453.19 3011.65,1450.86 3017.51,1445 3109.06,1445 J6.90@3110.08,1443.98
RX2_LoRa: D7.1 LoRa.1 U4.33 | length 680.9
  Top Layer w10: LoRa.1@690,1570 708.67,1588.67 728.67,1588.67 980.79,1840.79 U4.33@1094.25,1840.79
  Top Layer w20: D7.1@655,1420 655,1535 LoRa.1@690,1570
RX_CB: IC9.2 U4.41
RX_CELL: IC6.4 U4.17 | length 347.1
  Top Layer w10: U4.17@1264.53,2030.75 1264.53,2042.4 1265,2042.87 1265,2060 1325.59,2120.59 IC6.4@1557.6,2120.59
RX_CELL_1.8: IC6.2 IC7.12 | length 182.2
  Top Layer w10: IC6.2@1632.4,2095 1715,2095 1757.79,2052.21 1795.46,2052.21 IC7.12@1796.46,2051.22
RX_CELL_AUX: IC7.29 P1.1 | length 237.2
  Top Layer w10: IC7.29@2156.69,1624.06 2167.44,1613.31 2167.44,1592.56 2281.33,1478.67 2316.33,1478.67 P1.1@2320,1475
RX_GPS: U3.2 U4.25
SCL: IC3.2 J1.2 J6.5 P4.19 R26.2 U1.2 U2.2 | length 454.7
  Top Layer w5: U1.2@1650.39,623.07 1650.39,504.15 1696.74,457.8 1696.74,397.78 J1.2@1698.78,395.75
  Top Layer w10: J6.5@3369.92,298.31 3508.31,298.31 3525,315 R26.2@3525,360.31
SCLK: J6.66 J8.10 U4.4
SDA: IC3.4 J1.1 J6.3 P4.20 R25.2 U1.4 U2.4 | length 540.9
  Top Layer w5: U1.4@1684.25,623.07 1684.25,550.75 1787.32,447.68 1794.39,447.68 1816.89,425.18 J1.1@1816.89,395.75
  Top Layer w10: J6.3@3369.92,274.69 3509.69,274.69 3576.22,341.22 3576.22,356.54 R25.2@3580,360.31
SIM_CLK: D2.1 IC7.38 J2.3 | length 237.3
  Top Layer w20: J2.3@2570.94,1008.54 2574.88,1008.54 2596.38,987.05 2596.38,983.11 2609.49,970 D2.1@2789.96,970
SIM_IO: D4.1 IC7.39 J2.6 | length 457.9
  Top Layer w20: D4.1@1600,1014.96 2048.78,1014.96 J2.6@2055.19,1008.54
SIM_RST: D3.1 IC7.40 J2.2 | length 221.7
  Top Layer w20: J2.2@2570.94,1108.54 2577.4,1115 D3.1@2789.96,1115
TC1_GPIO18: J6.63 J8.1
TC2_GPIO19: J6.65 J8.3
TC3_GPIO24: J6.81 J8.5
TC4_GPIO26: J6.87 J8.7
TC5_GPIO9: J6.29 J8.9
TIMEPULSE: Q1.1 R8.1 U3.5 | length 484.7
  Top Layer w10: U3.5@735,2172.99 735,2250 895,2410 988.27,2410 R8.1@990,2408.27 1073.27,2408.27 Q1.1@1075,2410
TOG1: J6.9 P4.2
TOG2: J6.11 P4.3
TOG3: J6.15 P4.4
TOG4: J6.17 P4.5
TOG5: J6.21 P4.6
TOG6: J6.23 P4.7
TOG7: J6.27 P4.8
TOG8: J6.78 P4.9
TOG9: J6.76 P4.10
TOG10: J6.72 P4.11
TX2_LoRa: D8.1 LoRa.2 U4.34 | length 563.5
  Top Layer w10: LoRa.2@790,1559.61 790,1564.81 1046.3,1821.1 U4.34@1094.25,1821.1
  Top Layer w20: LoRa.2@790,1559.61 810,1539.61 D8.1@810,1420
TX_CB: IC9.3 U4.42
TX_CELL: IC5.2 U4.18
TX_CELL_1.8: IC5.4 IC7.13 | length 194.5
  Top Layer w10: IC5.4@1632.4,1934.41 1635.28,1937.28 1682.28,1937.28 1752.91,2007.91 IC7.13@1796.46,2007.91
TX_CELL_AUX: IC7.28 P1.2 | length 193.2
  Top Layer w10: IC7.28@2113.39,1624.06 2113.39,1581.61 P1.2@2220,1475
TX_GPS: U3.3 U4.26
USB_DM: J5.2 J6.167
USB_DP: J5.3 J6.165
V_BCKP: IC7.2 R3.1
VIN_GATE: Q2.1 R2.1 U5.4 | length 193.4
  Top Layer w10: Q2.1@497.68,1817.6 500.28,1815 R2.1@605,1815 U5.4@690,1815
VSIM: D1.1 IC7.41 J2.1 | length 229.5
  Top Layer w20: J2.1@2570.94,1208.54 2678.54,1208.54 2740,1270 D1.1@2775,1270
XIN: U4.45 X1.1 | length 345.6
  Top Layer w10: U4.45@1284.21,1749.25 1284.21,1620.79 1352.63,1552.37 1469.64,1552.37 X1.1@1472.01,1550
XOUT: U4.44 X1.2 | length 325.1
  Top Layer w10: X1.2@1097.99,1550 1102.99,1555 1200,1555 1264.53,1619.53 U4.44@1264.53,1749.25
Y1: IC9.5 P2.4 R10.1 | length 894.3
  Top Layer w10: R10.1@735,1060.12 740.12,1055 IC9.5@838.23,1055 890,1055 990,955 990,430 P2.4@1040,380
Z1: IC9.6 P2.3 R10.2 | length 801.4
  Top Layer w10: R10.2@735,1005 IC9.6@838.23,1005 890,1005 941.57,953.43 P2.3@941.57,380
pads on no net: IC1.3 IC1.7 IC3.3 IC3.7 IC4.4 IC7.6 IC7.7 IC7.8 IC7.9 IC7.10 IC7.11 IC7.16 IC7.17 IC7.18 IC7.19 IC7.23 IC7.24 IC7.25 IC7.31 IC7.33 IC7.34 IC7.35 IC7.36 IC7.37 IC7.42 IC7.44 IC7.45 IC7.46 IC7.47 IC7.48 IC7.49 IC7.62 IC8.3 IC8.7 IC10.3 IC10.7 IC11.6 J1.5 J1.6 J2.5 J2.Shiled J5.4 J6.2 J6.4 J6.6 J6.10 J6.12 J6.16 J6.18 J6.22 J6.24 J6.33 J6.34 J6.35 J6.36 J6.45 J6.46 J6.52 J6.54 J6.69 J6.70 J6.71 J6.75 J6.77 J6.83 J6.88 J6.89 J6.93 J6.94 J6.95 J6.96 J6.99 J6.100 J6.101 J6.102 J6.105 J6.106 J6.107 J6.108 J6.111 J6.112 J6.113 J6.114 J6.117 J6.118 J6.119 J6.120 J6.123 J6.124 J6.125 J6.126 J6.128 J6.129 J6.130 J6.131 J6.132 J6.135 J6.136 J6.137 J6.138 J6.141 J6.142 J6.143 J6.144 J6.147 J6.148 J6.149 J6.150 J6.153 J6.154 J6.155 J6.156 J6.158 J6.159 J6.160 J6.161 J6.162 J6.166 J6.168 J6.171 J6.172 J6.173 J6.174 J6.175 J6.176 J6.177 J6.178 J6.179 J6.180 J6.MH1 J6.MH2 U1.5 U1.6 U1.9 U1.10 U1.11 U1.12 U2.9 U2.10 U2.11 U2.12 U3.4 U3.13 U3.14 U3.15 U4.7 U4.11 U4.12 U4.13 U4.14 U4.15 U4.16 U4.19 U4.20 U4.21 U4.22 U4.23 U4.24 U4.27 U4.28 U4.29 U4.30 U4.31 U4.32 U4.35 U4.36 U4.37 U4.38 U4.39 U4.40 U4.48

## Polygon pours and split planes (outlines as drawn)
5V_PDB on Top Layer "5V_PDB_L01_P002" (solid, pour order 2): 490,1775 490,1680 355,1680 355,1710 200,1710 200,1905 450,1905 450,1775
no net on Top Layer "NONET_L01_P000" (solid, pour order 0): 250,1900
GND on Layer 2 "GND" (solid, pour order 10): 69.92,160 75,2875 cw(c130,2875) 130,2930 3615,2930 cw(c3615,2875) 3670,2875 3670,2455 3730,2395 3730,2275 3675,2220 3675,135 cw(c3620,135) 3620,80 133.97,80 cw(c141.98,151.98)
no net on Layer 2 "NONET_L03_P003" (solid, pour order 3): 505,1655
5V on Layer 1 "5V_L02_P017" (solid, pour order 17): 750,540 575,715 575,1925 1260,2610 2605,2610 2640,2575 2640,2200 2590,2150 1110,2150 850,1890 850,1260 995,1115 1295,1115 1555,1375 2625,1375 2720,1280 2720,610 2215,610 2020,805 1755,805 1490,540
3.3V on Layer 1 "3.3V_L02_P018" (solid, pour order 18): 901.45,1421.45 876.45,1446.45 876.47,1446.44 cw(c880,1450) 874.99,1450 874.99,1880 cw(c880,1880) 876.47,1883.56 876.45,1883.55 901.45,1908.55 901.44,1908.53 cw(c905,1905) 905,1910.01 1020,1910.01 cw(c1020,1905) 1023.56,1908.53 1023.55,1908.55 1063.55,1868.55 1063.53,1868.56 cw(c1060,1865) 1065.02,1865 1065.02,1702.08 1072.08,1695.01 1517.92,1695.01 1926.45,2103.55 1926.44,2103.53 cw(c1930,2100) 1930,2105.01 2745,2105.01 cw(c2745,2100) 2748.56,2103.53 2748.55,2103.55 2773.55,2078.55 2773.53,2078.56 cw(c2770,2075) 2775.01,2075 2775.01,1570 cw(c2770,1570) 2773.53,1566.44 2773.55,1566.45 2628.55,1421.45 2628.56,1421.47 cw(c2625,1425) 2625,1419.98 910.63,1419.98 cw(c910.63,1425) 907.82,1420.85 cw(c905,1425)
no net on Layer 1 "NONET_L02_P015" (solid, pour order 15): 1190,2365

## Silkscreen, mask and mechanical layers (free items; w line width, h text height)
Top Overlay:
  text "RX" at 560,1550 h36
  text "TX" at 855,1550 h36

## Text inside footprints (layer, text, board x,y; h text height)
J2: Top 3D Body "Via Limited Area" at 2135.9,1094.37 h23.62